# EAGLE board me433board4 (EAGLE 5.12)
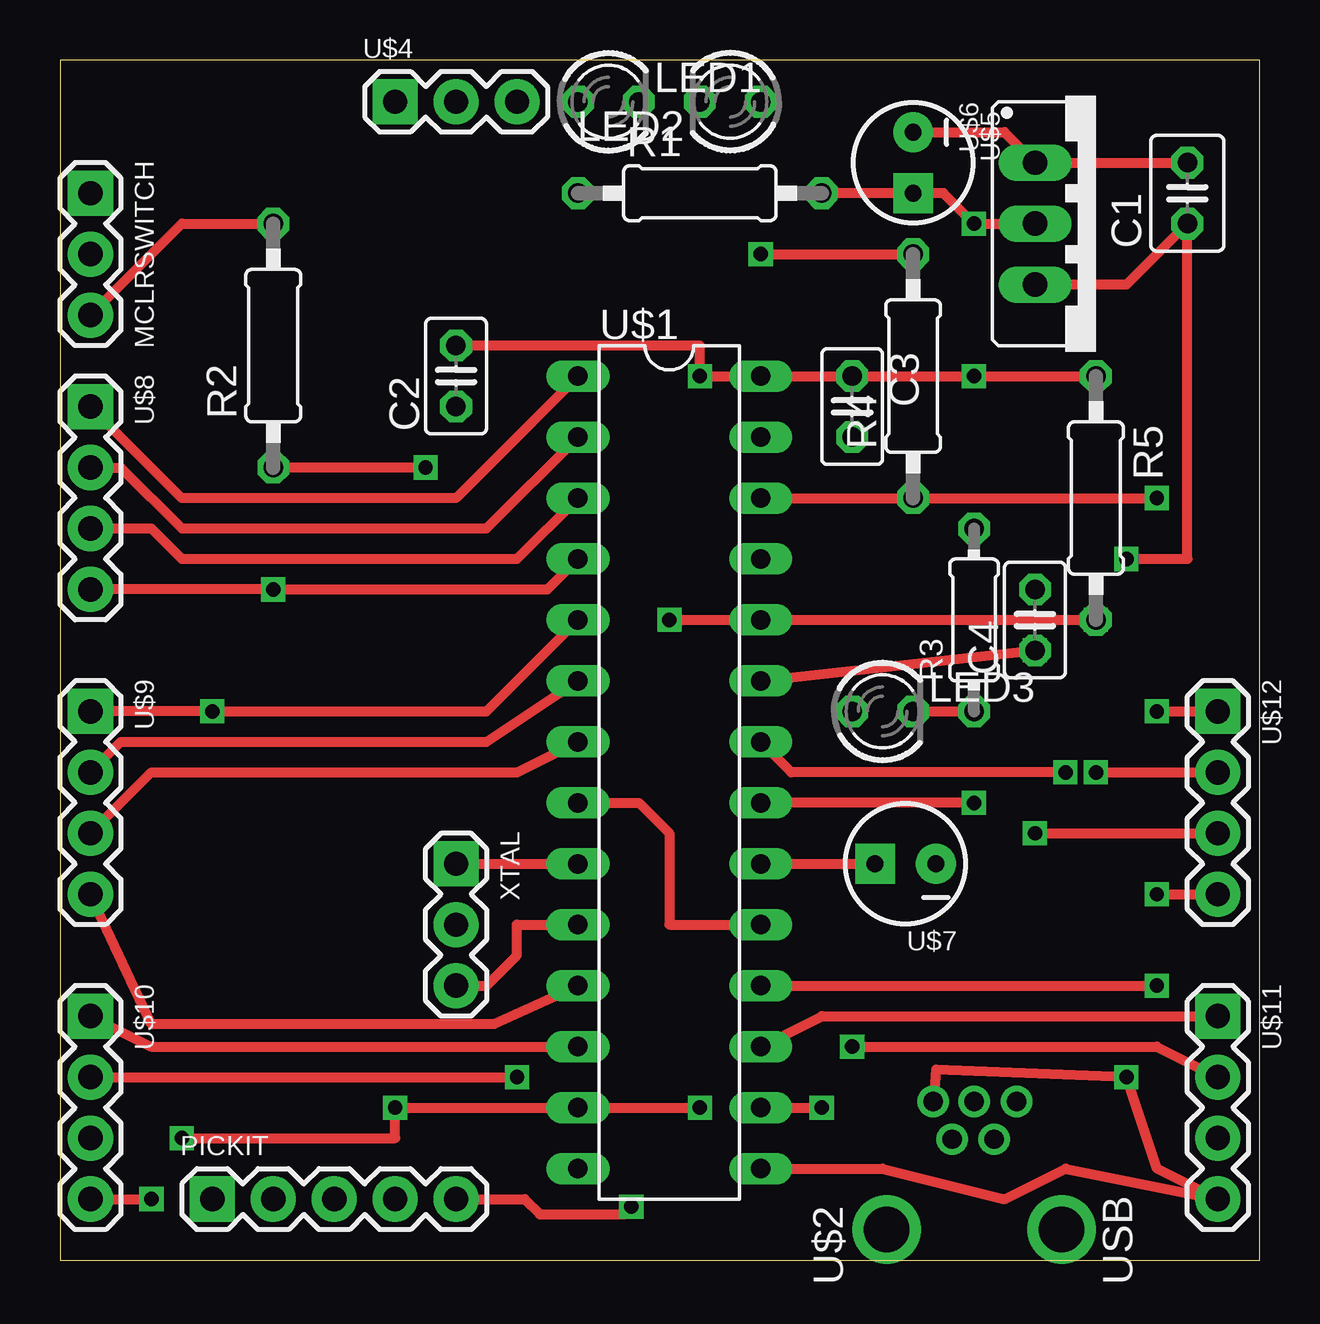
[diagram p0: board, top side]
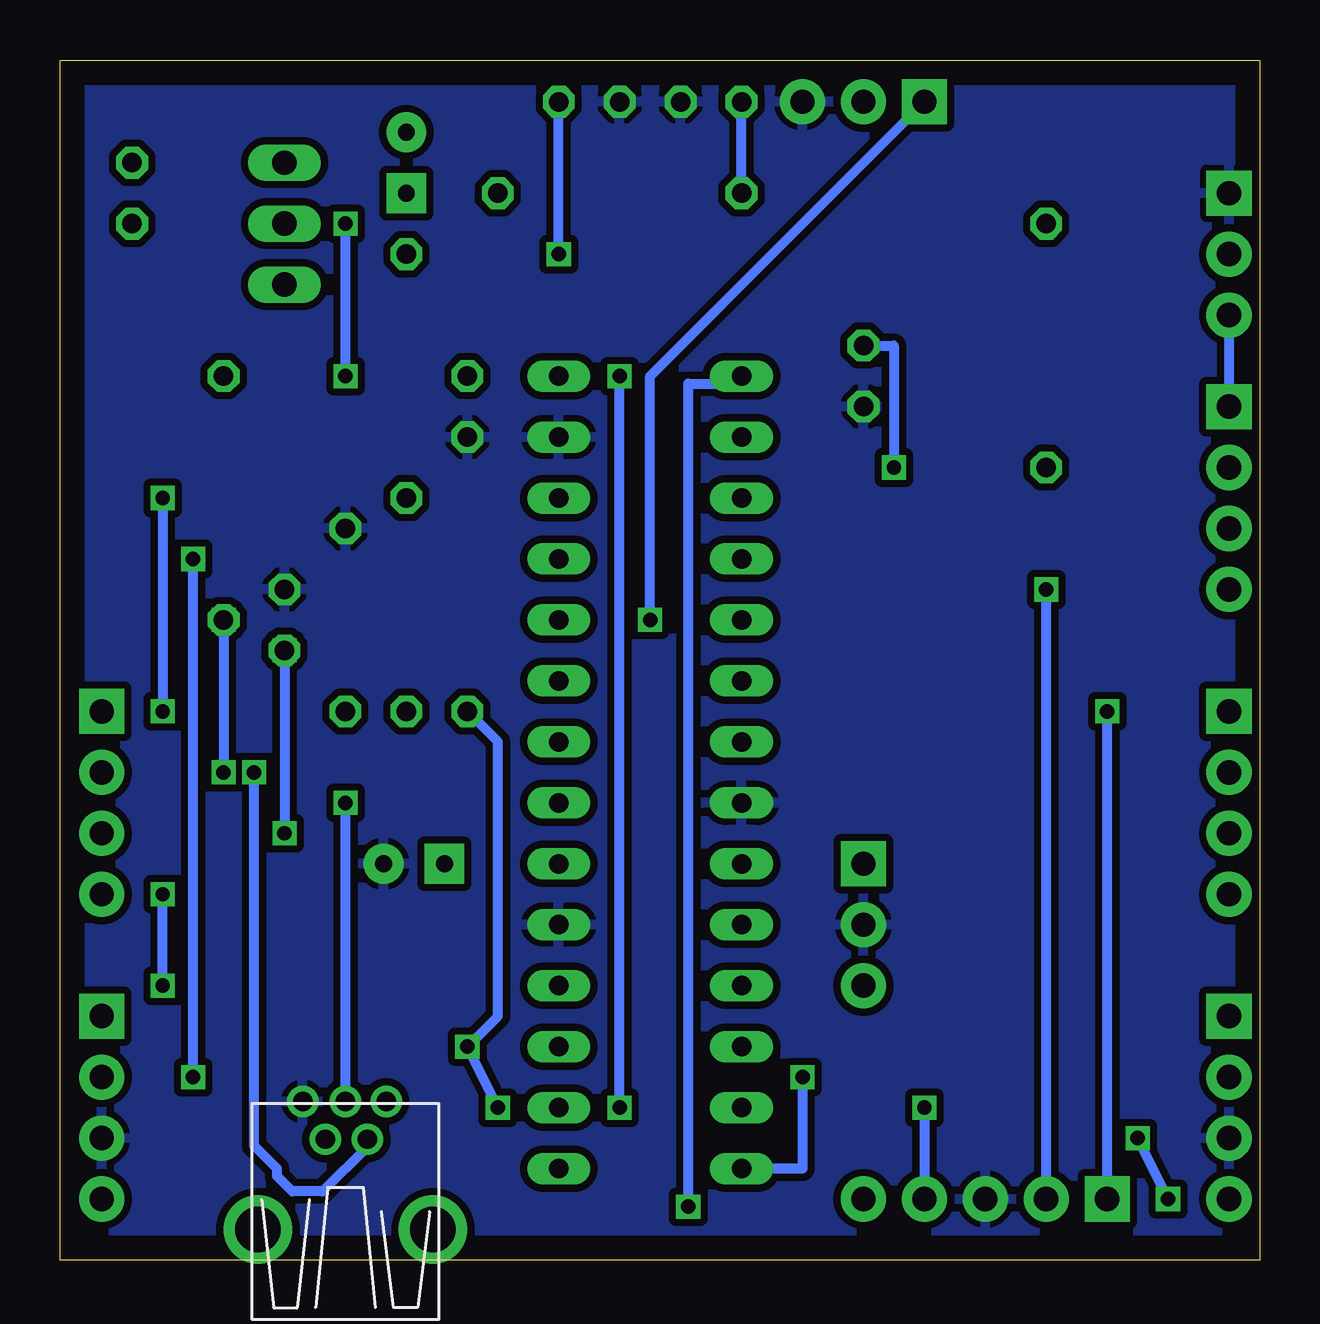
[diagram p1: board, bottom side, seen from below]

Size 50 x 50 mm. Coordinates in mm from the lower left corner, seen from the top.
Outline: 0,0 50,0 50,50 0,50 0,0
Copper layers (1*16): Top 0.035mm / dielectric 1.5mm / Bottom 0.035mm
Design rules "default": minimum track width 10mil, minimum drill 24mil, track to track 8mil, track to pad 8mil, pad to pad 8mil, via to via 8mil, smd to smd 8mil, copper to edge 40mil, drill to drill 8mil, minimum pad ring 10mil, minimum via ring 8mil, stop-mask expansion 4mil, vias tented up to drill 0mil, thermal gap 10mil

## Footprints (pad centres in the part's own frame; a part is rotated, then mirrored left to right if it is on the bottom)
C025-030X050 = drill 0.813 octagon: 1 -1.27,0; 2 1.27,0
C025-025X050 = drill 0.813 octagon: 1 -1.27,0; 2 1.27,0
LED3MM = drill 0.813 octagon: A -1.27,0; K 1.27,0
1X03 = drill 1.016 pad 1.88 square: 1 0,0 | drill 1.016 pad 1.88 round: 2 2.54,0; 3 5.08,0
1X05 = drill 1.016 pad 1.88 square: 1 0,0 | drill 1.016 pad 1.88 round: 2 2.54,0; 3 5.08,0; 4 7.62,0; 5 10.16,0
0207/10 = drill 0.813 octagon: 1 -5.08,0; 2 5.08,0
0204/7 = drill 0.813 octagon: 1 -3.81,0; 2 3.81,0
DIL28-3 = drill 0.813 long: 1 -16.51,-3.81; 2 -13.97,-3.81; 3 -11.43,-3.81; 4 -8.89,-3.81; 5 -6.35,-3.81; 6 -3.81,-3.81; 7 -1.27,-3.81; 8 1.27,-3.81; 9 3.81,-3.81; 10 6.35,-3.81; 11 8.89,-3.81; 12 11.43,-3.81; 13 13.97,-3.81; 14 16.51,-3.81; 15 16.51,3.81; 16 13.97,3.81; 17 11.43,3.81; 18 8.89,3.81; 19 6.35,3.81; 20 3.81,3.81; 21 1.27,3.81; 22 -1.27,3.81; 23 -3.81,3.81; 24 -6.35,3.81; 25 -8.89,3.81; 26 -11.43,3.81; 27 -13.97,3.81; 28 -16.51,3.81
USB-MINIB = drill 0.8 round: D+ 4.064,0; D- 2.489,0.914; GND 4.064,-1.778; ID 2.489,-0.838; VBUS 4.064,1.702 | drill 1.9 round: P$6 -1.27,-3.65; P$7 -1.27,3.65
CAP_POL_D = drill 0.7 pad 1.651 square: 1 1.27,0 | drill 0.7 pad 1.651 round: 2 -1.27,0
TO220 = drill 1.016 long: 1 -2.54,0; 2 0,0; 3 2.54,0
1X04 = drill 1.016 pad 1.88 square: 1 0,0 | drill 1.016 pad 1.88 round: 2 2.54,0; 3 5.08,0; 4 7.62,0

## Placement (x,y rotation side)
C1  [C025-030X050]  46.99,44.45 90 top
C2  [C025-025X050]  16.51,36.83 90 top
C3  [C025-025X050]  33.02,35.56 270 top
C4  [C025-025X050]  40.64,26.67 90 top
LED1  [LED3MM]  22.86,48.26 0 top
LED2  [LED3MM]  27.94,48.26 180 top
LED3  [LED3MM]  34.29,22.86 0 top
MCLRSWITCH  1X03_HEADER  [1X03]  1.27,44.45 270 top
PICKIT  1X05_HEADER  [1X05]  6.35,2.54 0 top
R1  [0207/10]  26.67,44.45 0 top
R2  [0207/10]  8.89,38.1 90 top
R3  [0204/7]  38.1,26.67 90 top
R4  [0207/10]  35.56,36.83 90 top
R5  [0207/10]  43.18,31.75 270 top
U$1  PIC28SKINNY  [DIL28-3]  25.4,20.32 270 top
U$2  USB  [USB-MINIB]  38.1,2.54 90 top
U$4  1X03_HEADER  [1X03]  13.97,48.26 0 top
U$5  CAP_POL  [CAP_POL_D]  35.56,45.72 270 top
U$6  LD1117  [TO220]  40.64,43.18 270 top
U$7  CAP_POL  [CAP_POL_D]  35.24,16.51 180 top
U$8  1X04_HEADER  [1X04]  1.27,35.56 270 top
U$9  1X04_HEADER  [1X04]  1.27,22.86 270 top
U$10  1X04_HEADER  [1X04]  1.27,10.16 270 top
U$11  1X04_HEADER  [1X04]  48.26,10.16 270 top
U$12  1X04_HEADER  [1X04]  48.26,22.86 270 top
XTAL  1X03_HEADER  [1X03]  16.51,16.51 270 top

## Library data of the parts
C1-C4 LED1-LED3 MCLRSWITCH PICKIT R1-R5 U$1 U$2 U$4-U$12 XTAL = ME433

## Nets
3.3V: C2.2 C3.1 PICKIT.4 R1.2 R2.1 R5.1 U$1.13 U$1.28 U$5.1 U$6.2 U$10.4
A0: U$1.2 U$8.2
A1: U$1.3 U$8.3
A2: U$1.9 XTAL.1
A3: U$1.10 XTAL.3
A4: U$1.12 U$10.1
B0: PICKIT.2 U$1.4 U$8.4
B1: PICKIT.1 U$1.5 U$9.1
B2: U$1.6 U$9.2
B3: U$1.7 U$9.3
B4: U$1.11 U$9.4
B5: U$1.14 U$10.2
B7: LED3.A U$1.16 U$11.2
B8: U$1.17 U$11.1
B9: U$1.18 U$12.4
B13: C4.1 U$1.23 U$12.3
B14: R5.2 U$1.24 U$4.1 U$12.2
B15: R4.1 U$1.26 U$12.1
D+: U$1.21 U$2.D+
D-: U$1.22 U$2.D-
GND: C2.1 C3.2 C4.2 LED1.K LED2.K MCLRSWITCH.1 PICKIT.3 R3.2 U$1.8 U$1.19 U$1.27 U$2.GND U$4.3 U$7.2 U$10.3 U$11.3 XTAL.2
MCLR: MCLRSWITCH.3 PICKIT.5 R2.2 U$1.1 U$8.1
N$3: C1.2 U$5.2 U$6.1
N$5: LED1.A R1.1
N$7: LED3.K R3.1
N$8: LED2.A R4.2
N$9: U$1.20 U$7.1
VBUS: C1.1 U$1.15 U$2.VBUS U$6.3 U$11.4

## Tracks (layer width: path | path; a pad name or v marks a point on that pad's centre or on a via)
3.3V  (via drill 0.6)
  Top 0.406: U$10.4 v3.81,2.54 | v5.08,5.08 13.97,5.08 v13.97,6.35 U$1.13 v26.67,6.35 | U$6.2 v38.1,43.18 36.83,44.45 U$5.1 R1.2 | R5.1 v38.1,36.83 C3.1 U$1.28 v26.67,36.83 26.67,38.1 C2.2 | v15.24,33.02 R2.1
  Bottom 0.406: v13.97,6.35 PICKIT.4 | v3.81,2.54 v5.08,5.08 | v38.1,36.83 v38.1,43.18 | v26.67,6.35 v26.67,36.83 | v15.24,33.02 15.24,38.1 C2.2
A0
  Top 0.406: U$8.2 2.54,33.02 5.08,30.48 17.78,30.48 U$1.2
A1
  Top 0.406: U$8.3 3.81,30.48 5.08,29.21 19.05,29.21 U$1.3
A2
  Top 0.406: XTAL.1 U$1.9
A3
  Top 0.406: XTAL.3 17.78,11.43 19.05,12.7 19.05,13.97 U$1.10
A4
  Top 0.406: U$10.1 3.81,8.89 U$1.12
B0  (via drill 0.6)
  Top 0.406: U$8.4 v8.89,27.94 20.32,27.94 U$1.4
  Bottom 0.406: PICKIT.2 v8.89,27.94
B1  (via drill 0.6)
  Top 0.406: U$9.1 v6.35,22.86 17.78,22.86 U$1.5
  Bottom 0.406: PICKIT.1 v6.35,22.86
B2
  Top 0.406: U$1.6 17.78,21.59 2.54,21.59 U$9.2
B3
  Top 0.406: U$9.3 3.81,20.32 19.05,20.32 U$1.7
B4
  Top 0.406: U$1.11 18.1,9.84 3.81,9.84 U$9.4
B5  (via drill 0.6)
  Top 0.406: U$10.2 v19.05,7.62
  Bottom 0.406: v19.05,7.62 19.05,3.81 U$1.14
B7  (via drill 0.6)
  Top 0.406: U$1.16 v31.75,6.35 | v33.02,8.89 45.72,8.89 U$11.2
  Bottom 0.406: v31.75,6.35 v33.02,8.89 31.75,10.16 31.75,21.59 LED3.A
B8
  Top 0.406: U$11.1 31.75,10.16 U$1.17
B9  (via drill 0.6)
  Top 0.406: U$1.18 v45.72,11.43 | v45.72,15.24 U$12.4
  Bottom 0.406: v45.72,11.43 v45.72,15.24
B13  (via drill 0.6)
  Top 0.406: v40.64,17.78 U$12.3 | U$1.23 C4.1
  Bottom 0.406: C4.1 v40.64,17.78
  other vias: 40.64,25.4
B14  (via drill 0.6)
  Top 0.406: v43.18,20.32 U$12.2 | R5.2 U$1.24 v25.4,26.67
  Bottom 0.406: R5.2 v43.18,20.32 | U$4.1 25.4,36.83 v25.4,26.67
  other vias: 43.18,26.67
B15  (via drill 0.6)
  Top 0.406: v45.72,22.86 U$12.1 | R4.1 U$1.26 v45.72,31.75
  Bottom 0.406: v45.72,31.75 v45.72,22.86
D+  (via drill 0.6)
  Top 0.406: v38.1,19.05 U$1.21
  Bottom 0.406: U$2.D+ v38.1,19.05
D-  (via drill 0.6)
  Top 0.406: v41.91,20.32 30.48,20.32 U$1.22
  Bottom 0.406: U$2.D- 37.19,4.72 39.05,2.86 40.32,2.86 40.96,3.49 40.96,3.81 41.91,4.76 v41.91,20.32
GND
  Top 0.406: U$1.8 24.13,19.05 25.4,17.78 25.4,13.97 U$1.19
  pour Bottom (isolate 0.305): 0,49.53 0,0 49.53,0 49.53,49.53
MCLR  (via drill 0.6)
  Top 0.406: U$1.1 16.51,31.75 5.08,31.75 U$8.1 | R2.2 5.08,43.18 MCLRSWITCH.3 | PICKIT.5 19.37,2.54 20,1.91 23.5,1.91 v23.81,2.22
  Bottom 0.406: U$8.1 MCLRSWITCH.3 | v23.81,2.22 23.81,36.51 21.91,36.51 U$1.1
N$3
  Top 0.406: C1.2 U$6.1 39.37,46.99 U$5.2
N$5
  Bottom 0.406: R1.1 LED1.A
N$7
  Top 0.406: LED3.K R3.1
N$8  (via drill 0.6)
  Top 0.406: v29.21,41.91 R4.2
  Bottom 0.406: v29.21,41.91 LED2.A
N$9
  Top 0.406: U$1.20 U$7.1
VBUS  (via drill 0.6)
  Top 0.406: U$1.15 34.29,3.81 39.37,2.54 41.91,3.81 U$11.4 45.72,3.81 v44.45,7.62 36.51,7.94 U$2.VBUS | v44.45,29.21 46.99,29.21 C1.1 44.45,40.64 U$6.3
  Bottom 0.406: v44.45,7.62 v44.45,29.21